# EAGLE board module_SX1278_B (EAGLE 8.4.0)
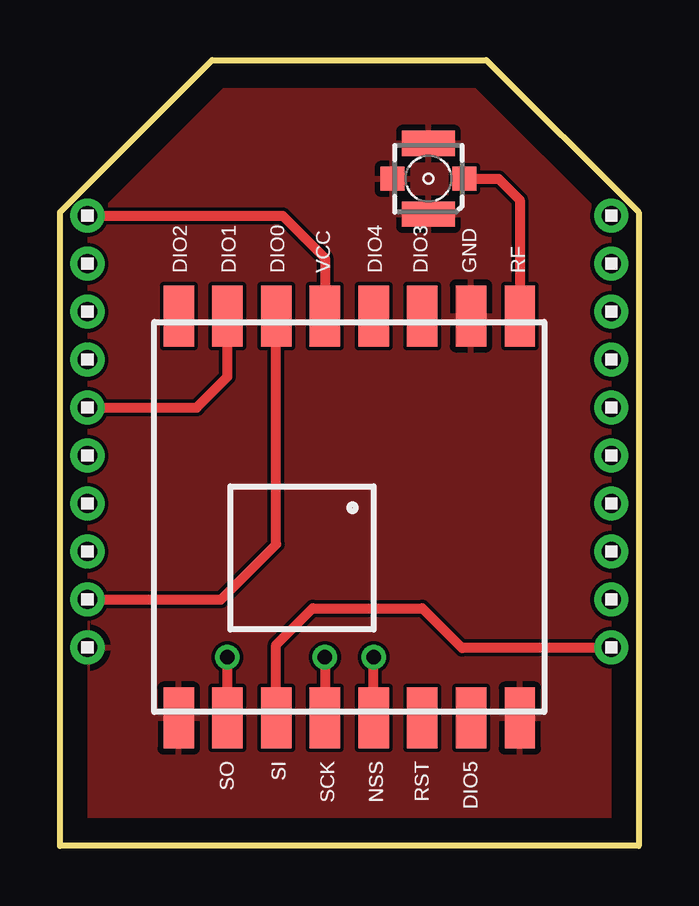
[diagram p0: board, top side]
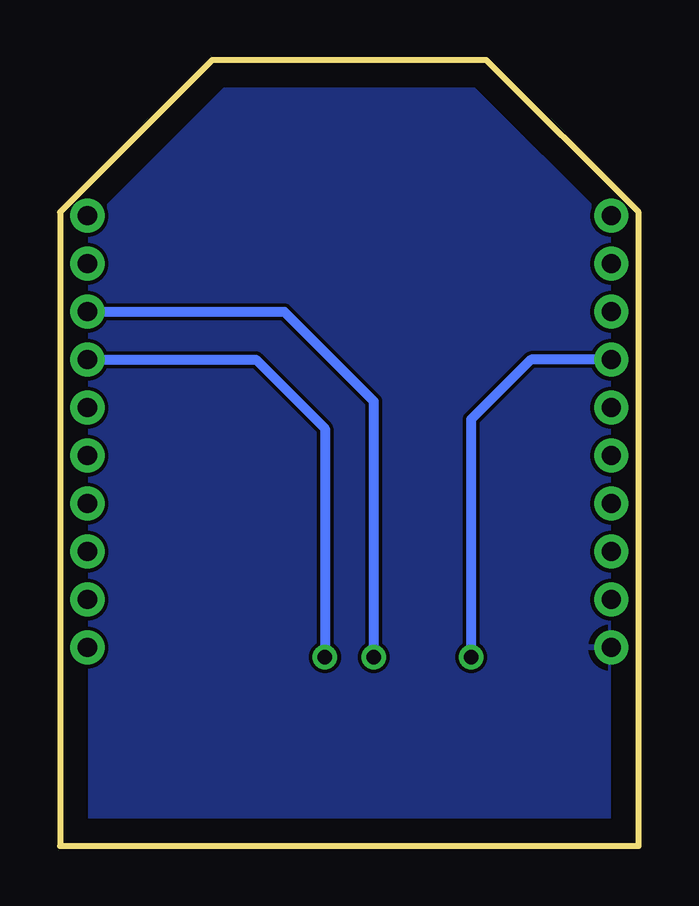
[diagram p1: board, bottom side, seen from below]

Size 24.13 x 32.77 mm. Coordinates in mm from the lower left corner, seen from the top.
Outline: 0,0 0,26.42 6.35,32.77 17.78,32.77 24.13,26.42 24.13,0 0,0
Copper layers (1*16): Top 0.035mm / dielectric 1.5mm / Bottom 0.035mm
Design rules "default": minimum track width 6mil, minimum drill 0.35mm, track to track 6mil, track to pad 6mil, pad to pad 6mil, via to via 6mil, smd to smd 6mil, copper to edge 40mil, drill to drill 6mil, minimum pad ring 10mil, minimum via ring 8mil, stop-mask expansion 4mil, vias tented up to drill 0mil, thermal gap 10mil

## Footprints (pad centres in the part's own frame; a part is rotated, then mirrored left to right if it is on the bottom)
SMD1,27-2,54 = smd 1.27 x 2.54: 1 0,0
1X10 = drill 0.8 pad 1.422: 1 -9,0; 2 -7,0; 3 -5,0; 4 -3,0; 5 -1,0; 6 1,0; 7 3,0; 8 5,0; 9 7,0; 10 9,0
734120110 = smd 1 x 1: 1 0,-1.5; S@1 0,1.5 | smd 1.05 x 2.2: S@2 -1.475,0; S@3 1.475,0

## Placement (x,y rotation side)
DIO0  [SMD1,27-2,54]  9.02,22.1 180 top
DIO1  [SMD1,27-2,54]  6.99,22.1 180 top
DIO2  [SMD1,27-2,54]  4.95,22.1 180 top
DIO3  [SMD1,27-2,54]  15.11,22.1 0 top
DIO4  [SMD1,27-2,54]  13.08,22.1 180 top
DIO5  [SMD1,27-2,54]  17.14,5.33 0 top
GND  [SMD1,27-2,54]  17.14,22.1 0 top
GND2  [SMD1,27-2,54]  4.95,5.33 180 top
GND_ANT  [SMD1,27-2,54]  19.18,5.33 0 top
LEFT1  1X10  [1X10]  1.14,17.27 270 top
NSS  [SMD1,27-2,54]  13.08,5.33 180 top
RF  [SMD1,27-2,54]  19.18,22.1 0 top
RIGHT1  1X10  [1X10]  22.99,17.27 270 top
RST  [SMD1,27-2,54]  15.11,5.33 0 top
SCK  [SMD1,27-2,54]  11.05,5.33 180 top
SI  [SMD1,27-2,54]  9.02,5.33 180 top
SO  [SMD1,27-2,54]  6.99,5.33 0 top
VCC  [SMD1,27-2,54]  11.05,22.1 0 top
X1  734120110  [734120110]  15.37,27.81 90 top

## Library data of the parts
DIO0 DIO1-DIO5 GND GND2 GND_ANT NSS RF RST SCK SI SO VCC = wirepad
LEFT1 RIGHT1 = headers(2mm)
X1 = con-coax

## Nets
ANT: RF.1 X1.1
GND: GND2.1 GND.1 GND_ANT.1 LEFT1.10 X1.S@1 X1.S@2 X1.S@3
INT0: DIO0.1 LEFT1.9
INT1: DIO1.1 LEFT1.5
SCPI_SCK: RIGHT1.3 SCK.1
SPI_CS: NSS.1 RIGHT1.4
SPI_MISO: LEFT1.4 SO.1
SPI_MOSI: RIGHT1.10 SI.1
VCC: LEFT1.1 VCC.1

## Tracks (layer width: path | path; a pad name or v marks a point on that pad's centre or on a via)
ANT
  Top 0.406: X1.1 18.29,27.81 19.18,26.92 RF.1
GND
  pour Bottom: -0.51,-0.51 -0.51,26.67 6.1,33.27 18.03,33.27 24.64,26.67 24.64,-0.51
  pour Top: -0.25,-0.25 -0.25,26.54 6.22,33.02 17.91,33.02 24.38,26.54 24.38,-0.25
INT0
  Top 0.406: LEFT1.9 6.72,10.27 9.02,12.57 DIO0.1
  Bottom 0.406: LEFT1.9 1.16,10.29
INT1
  Top 0.406: LEFT1.5 5.7,18.27 6.99,19.56 DIO1.1
SCPI_SCK  (via drill 0.61)
  Top 0.406: v11.05,7.87 SCK.1
  Bottom 0.406: RIGHT1.3 14.78,22.27 11.05,18.54 v11.05,7.87
SPI_CS  (via drill 0.61)
  Top 0.406: NSS.1 v13.08,7.87
  Bottom 0.406: v13.08,7.87 13.08,17.4 15.95,20.27 RIGHT1.4
SPI_MISO  (via drill 0.61)
  Top 0.406: SO.1 v6.99,7.87
  Bottom 0.406: LEFT1.4 4.49,20.27 6.99,17.78 v6.99,7.87
SPI_MOSI
  Top 0.406: SI.1 9.02,8.38 10.54,9.91 15.11,9.91 16.76,8.25 22.78,8.25 22.8,8.27 RIGHT1.10
VCC
  Top 0.406: VCC.1 11.05,24.51 9.29,26.27 LEFT1.1

## Text on the board
_tNames: DIO2 | DIO1 | DIO0 | VCC | DIO4 | DIO3 | GND | RF | SO | SI | SCK | NSS | RST | DIO5
HeatSink: PWR: / LOG: | 3.3 V / 3.3 V | SX1278 | GND | GND